# Altium PCB MultiVibrator.PcbDoc
Units mil, origin at the board's own origin, x right, y up, seen from the top; angles counter-clockwise.
Board outline 3000 x 3000 mil, 2 copper layers (Top Layer, Bottom Layer); 9 components, 6 nets, 20 pads, 0 vias.
Unrouted connection lines stored in the file: 14.
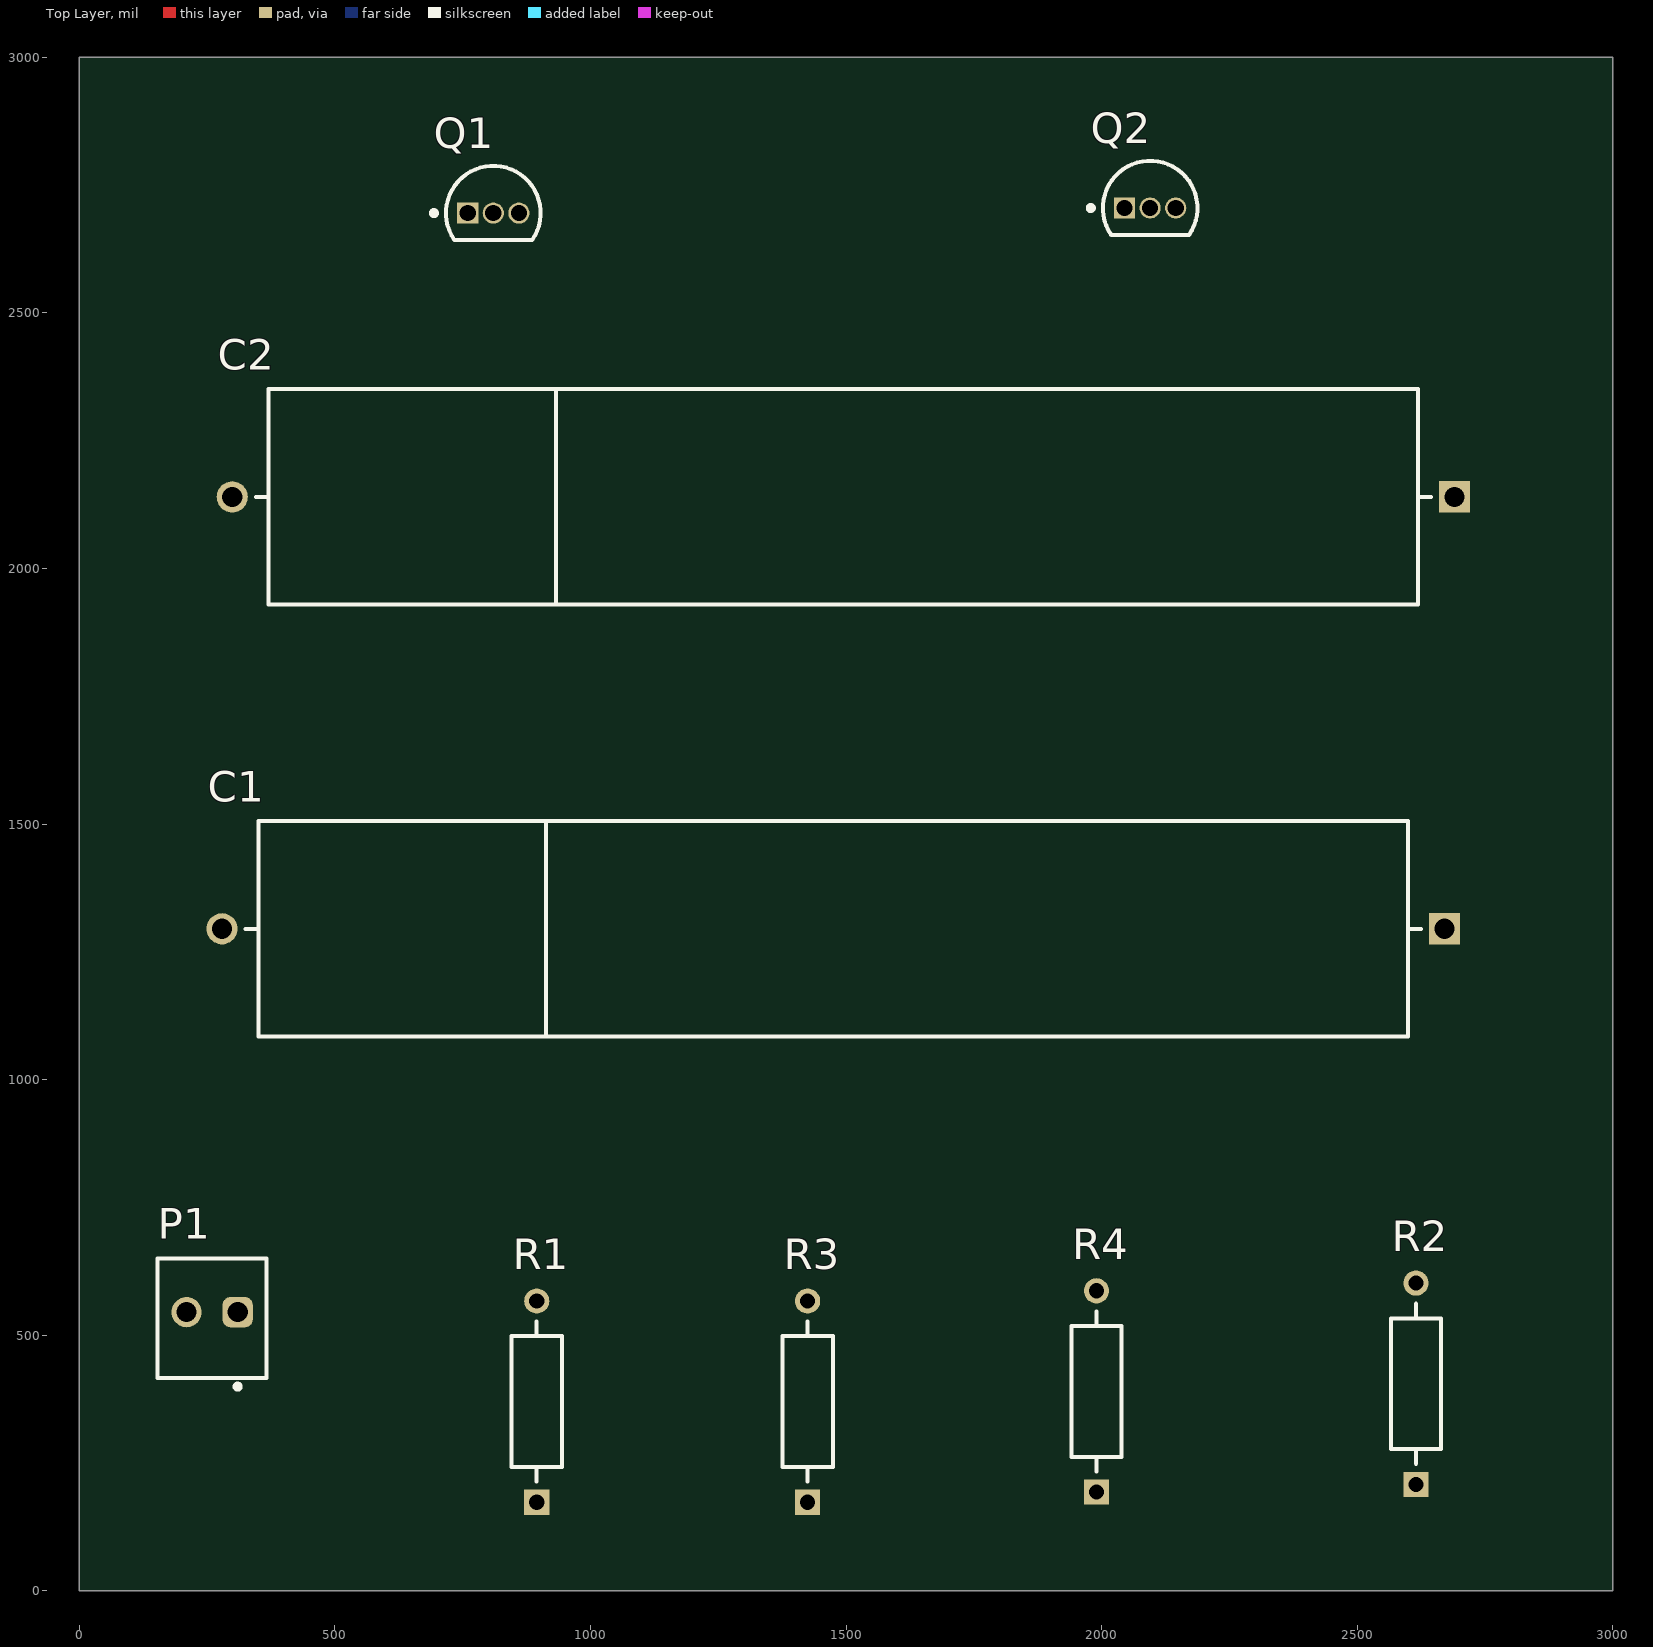
[diagram p0: Top Layer view]
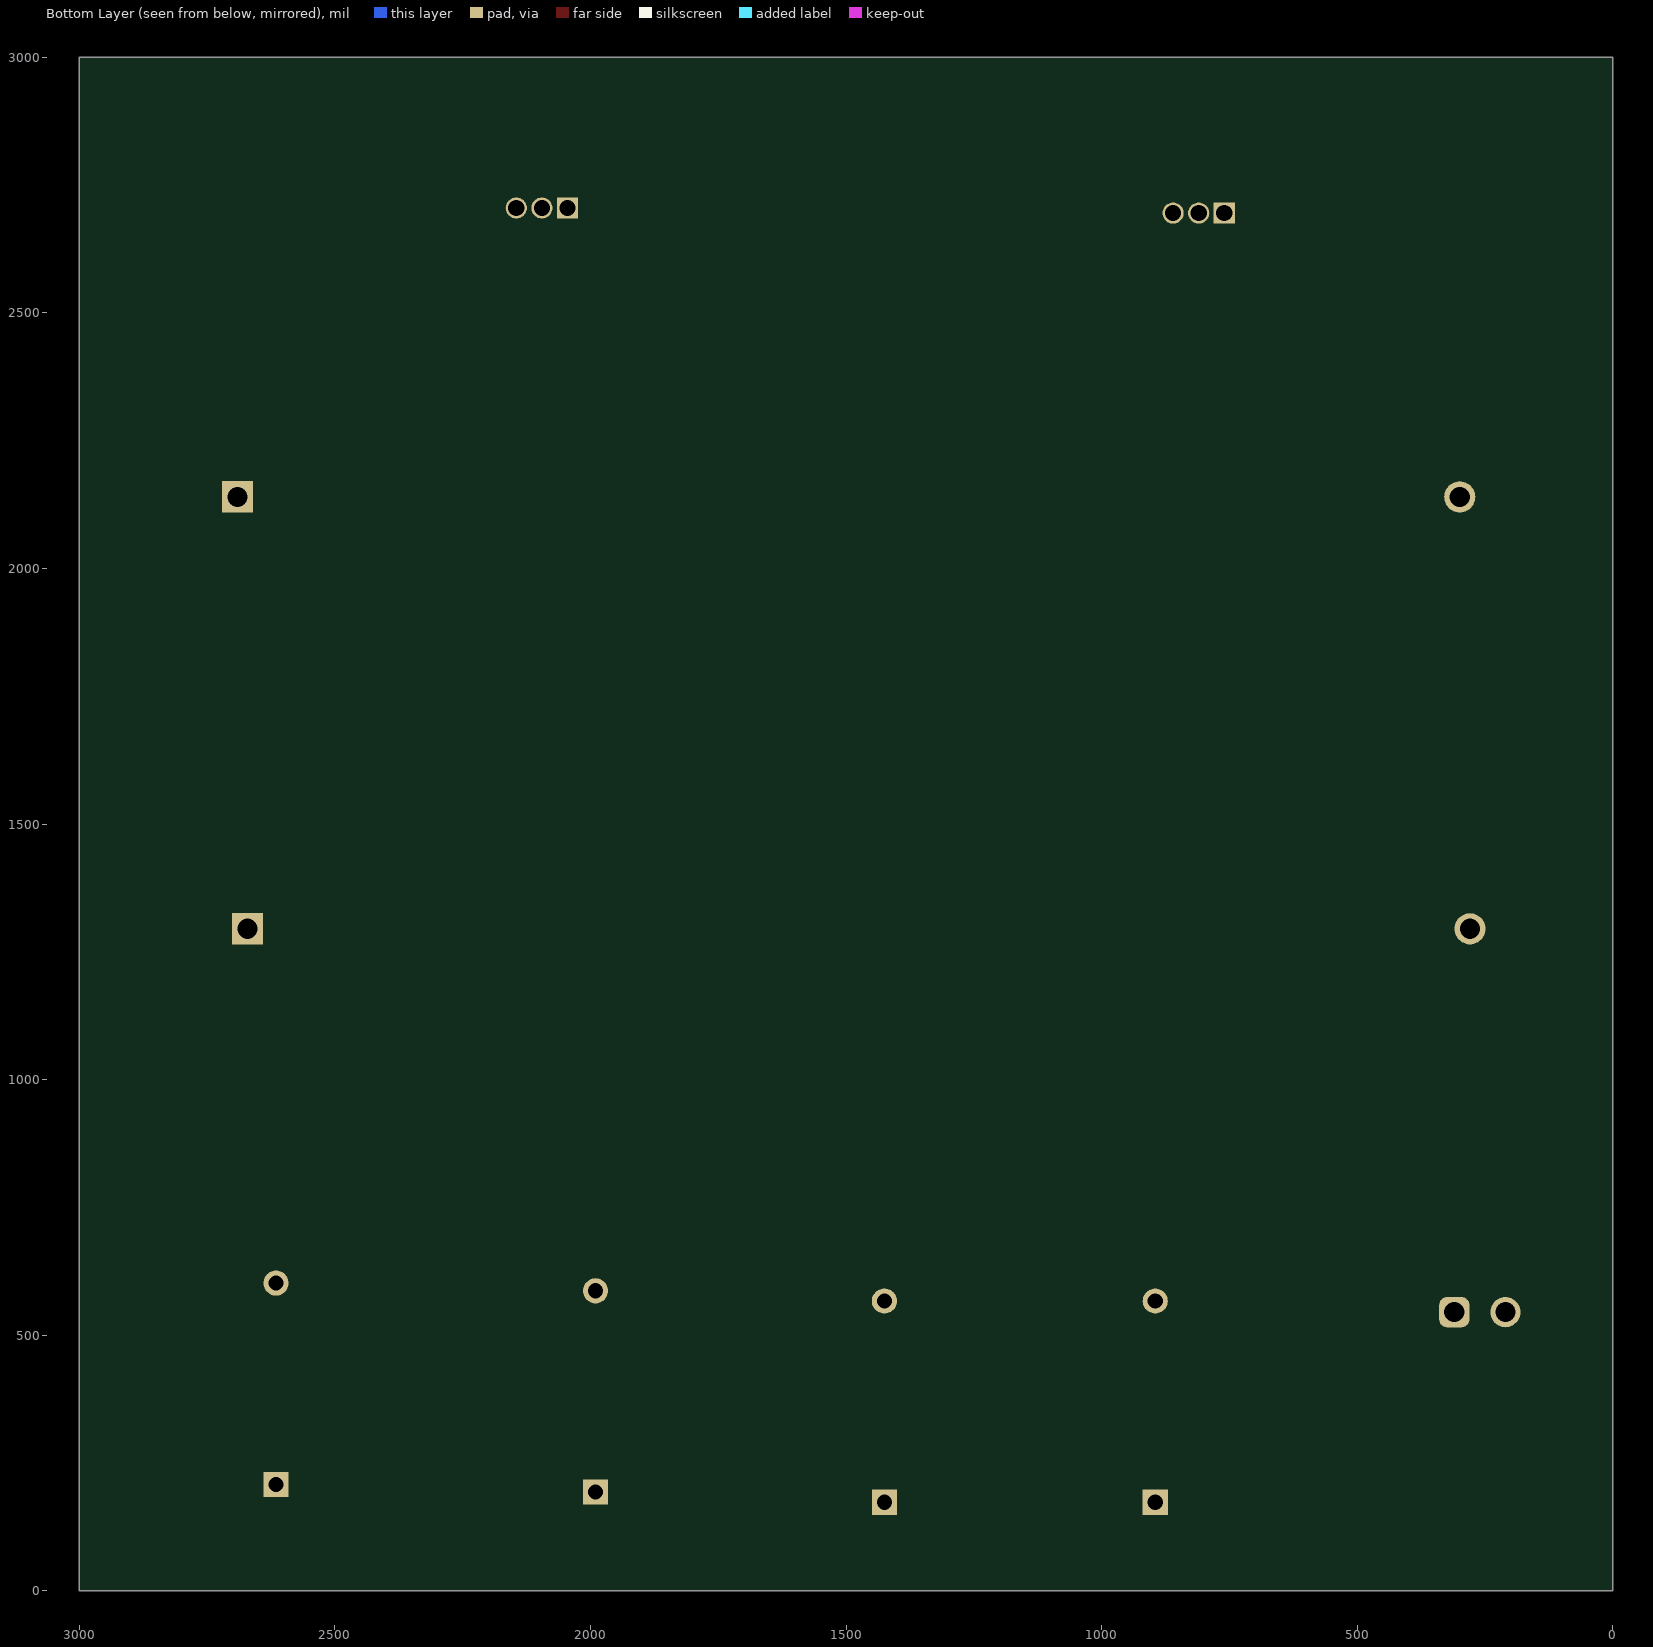
[diagram p1: Bottom Layer view, seen from below]

## Layer stack, top to bottom
Top Solder: solder mask 0.4, Solder Resist, Dk 3.5
Top Layer: signal copper 1.4
Dielectric 1: dielectric 12.6, FR-4, Dk 4.8
Bottom Layer: signal copper 1.4
Bottom Solder: solder mask 0.4, Solder Resist, Dk 3.5

## Board outline
0,0 3000,0 3000,3000 0,3000

## Design rules (kind name [scope] priority, off if disabled: settings)
Clearance [All] p1: gap=10 ignorepadtopadclearanceinfootprint=FALSE except(0: Arc-Hole Track-Hole SMDPad-Hole THPad-Hole Via-Hole Fill-Hole Poly-Hole Region-Hole Text-Hole)
PolygonConnect [All] p1: connectstyle=Relief reliefconductorwidth=10 reliefentries=4 polygonreliefangle="90 Angle" airgapwidth=10
RoutingVias [All] p1: holewidth=28 width=50 viastyle="Through Hole" minholewidth=28 minwidth=50 maxholewidth=28 maxwidth=50
SolderMaskExpansion [All] p1: expansion=4 istentingtop=FALSE
Width [All] p1: maxlimit=10 minlimit=10 preferedwidth=10
30 further rules are at their usual default settings.

## Components (designator, comment, footprint, x,y, rotation, side; value= is the part's Value field where it differs from the comment)
C1 "" FP-600D107G070DL4-MFG 1475,1295 r180 top
C2 "" FP-600D107G070DL4-MFG 1495,2140 r180 top
P1 "61900211121" 61900211121 260,533.19 r0 top
Q1 "2N3904" ONSC-TO-92-3-29-11 810,2695 r0 top
Q2 "2N3904" ONSC-TO-92-3-29-11 2095,2705 r0 top
R1 "" FP-MRS25-MFG 895,370 r90 top
R2 "" FP-MRS25-MFG 2615,405 r90 top
R3 "" FP-MRS25-MFG 1425,370 r90 top
R4 "" FP-MRS25-MFG 1990,390 r90 top

## Footprints (in the part's own frame and the unit in brackets; to place one, negate y for a bottom-side part, rotate by r counter-clockwise, add the part's x,y. Pads: shape width x height; smd on the part's side, far side on the other; paste and mask are expansions set on the pad)
61900211121 [mm] "2.54mm Male Locking Header, 2p"
  rrect50% 1.5x1.5 hole 1: 1(1.27,0.3)
  round 1.5 hole 1: 2(-1.27,0.3)
  silkscreen extent -2.71,-3.52 2.71,2.98, body extent -2.54,-2.9 2.54,2.9, height 11.53
FP-600D107G070DL4-MFG [mm]
  rect 1.55x1.55 hole 1 paste-1000 mask+0: 1(-30.37,0)
  round 1.55 hole 1 paste-1000 mask+0: 2(30.37,0)
  silkscreen extent -29.19,-5.36 29.19,5.36, body extent -31.24,-5.46 31.24,5.46, height 0.25
FP-MRS25-MFG [mm]
  rect 1.25x1.25 hole 0.75 paste-1000 mask+0: 1(-5,0)
  round 1.25 hole 0.75 paste-1000 mask+0: 2(5,0)
  silkscreen extent -3.98,-1.25 3.98,1.25, body extent -5.72,-1.35 5.72,1.35, height 0.25
ONSC-TO-92-3-29-11 [mm] "TO, 3-Leads, Body Dia 4.7mm, Pitch 1.27mm"
  rect 1.05x1.05 hole 0.8: 1(-1.27,0)
  round 1.05 hole 0.8: 2(0,0) 3(1.27,0)
  silkscreen extent -3.07,-1.34 2.35,2.35, body extent -2.35,-1.33 2.36,2.36, height 7.87

## Part data
C1 C2: library part CMP-00030-74775681-2, "600D107G070DL4 Cap Alum 100UF 70V Axial", Capacitance=20N, Case/Package=Axial, Max Operating Temperature=125°C, Min Operating Temperature=-55°C, Voltage Rating=70V, Height=10.71mm, Length=55.5498mm, Life (Hours)=2000hours, Mount="Through Hole", NexarPartId=74775681, Polarity=Polar, RoHS=Compliant
P1: library part CMP-1502-00584-3, Color=Beige, Contact Resistance=20mΩ, Current Rating=3A, Flammability Rating="UL94 V-0", Insulation Resistance=1GΩ, Max Operating Temperature=105°C, Min Operating Temperature=-40°C, Operating Supply Voltage=250V, Connector Type="Male Pin", Contact Gender=Male, Contact Material=Copper, Contact Mating Length=7.493mm, Contact Plating=Tin, Fastening Type=Friction, Gender=Male, Height=11.75mm, Housing Material=Nylon, Lead Pitch=2.54mm, Length=5.08mm, Mount="Through Hole", NexarPartId=18818218, Number of Contacts=2, Number of Pins=2, Number of Positions=2, Number of Rows=1, Orientation=Vertical, Packaging=Bulk, Pitch=2.54mm, REACH SVHC=Unknown, RoHS=Compliant, Termination="Through Hole", Voltage Rating=250V, Width=5.12mm
Q1 Q2: library part CMP-1048-01458-1, "Amplifier Transistor, NPN Silicon, 3-Pin TO-92, Bulk Box", Manufacturer="On Semiconductor", PartNumber=BC337, ComponentLink1Description="Manufacturer URL", ComponentLink1URL=http://www.onsemi.com/, ComponentLink2Description=Datasheet, ComponentLink2URL=http://www.onsemi.com/pub_link/Collateral/BC337-D.PDF, ComponentLink3Description="Package Specification", ComponentLink3URL=http://www.onsemi.cn/pub_link/Collateral/2N6426-D.PDF, DatasheetVersion="Rev. 8", IC Continuous (A)=0.8, Mounting Technology="Through Hole", Note1=0, PackageDescription="3-Pin Transistor Outline, Body 4.825 x 3.685 mm, Pitch 1.27 mm", PackageReference=TO-92-3-29-11_AM_SL, PackageVersion="Rev. AM", Packing="Bulk Box", Polarity=NPN, RoHS=FALSE
R1 R2: library part CMP-02408-000052-1, "RES 562 OHM 0.6W 1% AXIAL", Case/Package=Axial, Max Operating Temperature=155°C, Max Power Dissipation=600mW, Min Operating Temperature=-55°C, Package Quantity=1, Resistance=100K, Resistor Type="Thin Film", Temperature Coefficient=50ppm/°C, Tolerance=1%, Voltage Rating=350V, Contact Plating=Tin, Diameter=2.5mm, Lead Diameter=0.6mm, Lead Free="Lead Free", Length=6.5mm, Mount="Through Hole", Number of Terminations=2, Packaging="Tape and Reel", Power Rating=600mW, Radiation Hardening=No, RoHS Compliant=Yes, Series=MRS25, Technology="METAL FILM", Termination=Axial, Width=2.5mm
R3 R4: library part CMP-02408-000052-1, "RES 562 OHM 0.6W 1% AXIAL", Case/Package=Axial, Max Operating Temperature=155°C, Max Power Dissipation=600mW, Min Operating Temperature=-55°C, Package Quantity=1, Resistance=1K, Resistor Type="Thin Film", Temperature Coefficient=50ppm/°C, Tolerance=1%, Voltage Rating=350V, Contact Plating=Tin, Diameter=2.5mm, Lead Diameter=0.6mm, Lead Free="Lead Free", Length=6.5mm, Mount="Through Hole", Number of Terminations=2, Packaging="Tape and Reel", Power Rating=600mW, Radiation Hardening=No, RoHS Compliant=Yes, Series=MRS25, Technology="METAL FILM", Termination=Axial, Width=2.5mm

## Nets (pads, with @x,y where several pads share a name; then routed paths per layer and width w, separated by ;. In a path a pad name is that pad's centre, name@x,y a point inside that pad or via, vN(x,y) a via of type N, cw(c..) or ccw(c..) an arc to the next point about the centre after c; other vN are vias at no path point)
9V: P1.1 R1.2 R2.2 R3.2 R4.2
GND: P1.2 Q1.3 Q2.3
NetC1_1: C1.1 Q2.2 R2.1
NetC1_2: C1.2 Q1.1 R3.1
NetC2_1: C2.1 Q2.1 R4.1
NetC2_2: C2.2 Q1.2 R1.1